# Altium PCB XH发衣柜从板.PcbDoc
Units mil, origin at the board's own origin, x right, y up, seen from the top; angles counter-clockwise.
Board outline 3160.03 x 1978.53 mil, 2 copper layers (Top Layer, Bottom Layer); 54 components, 33 nets, 159 pads, 238 vias.
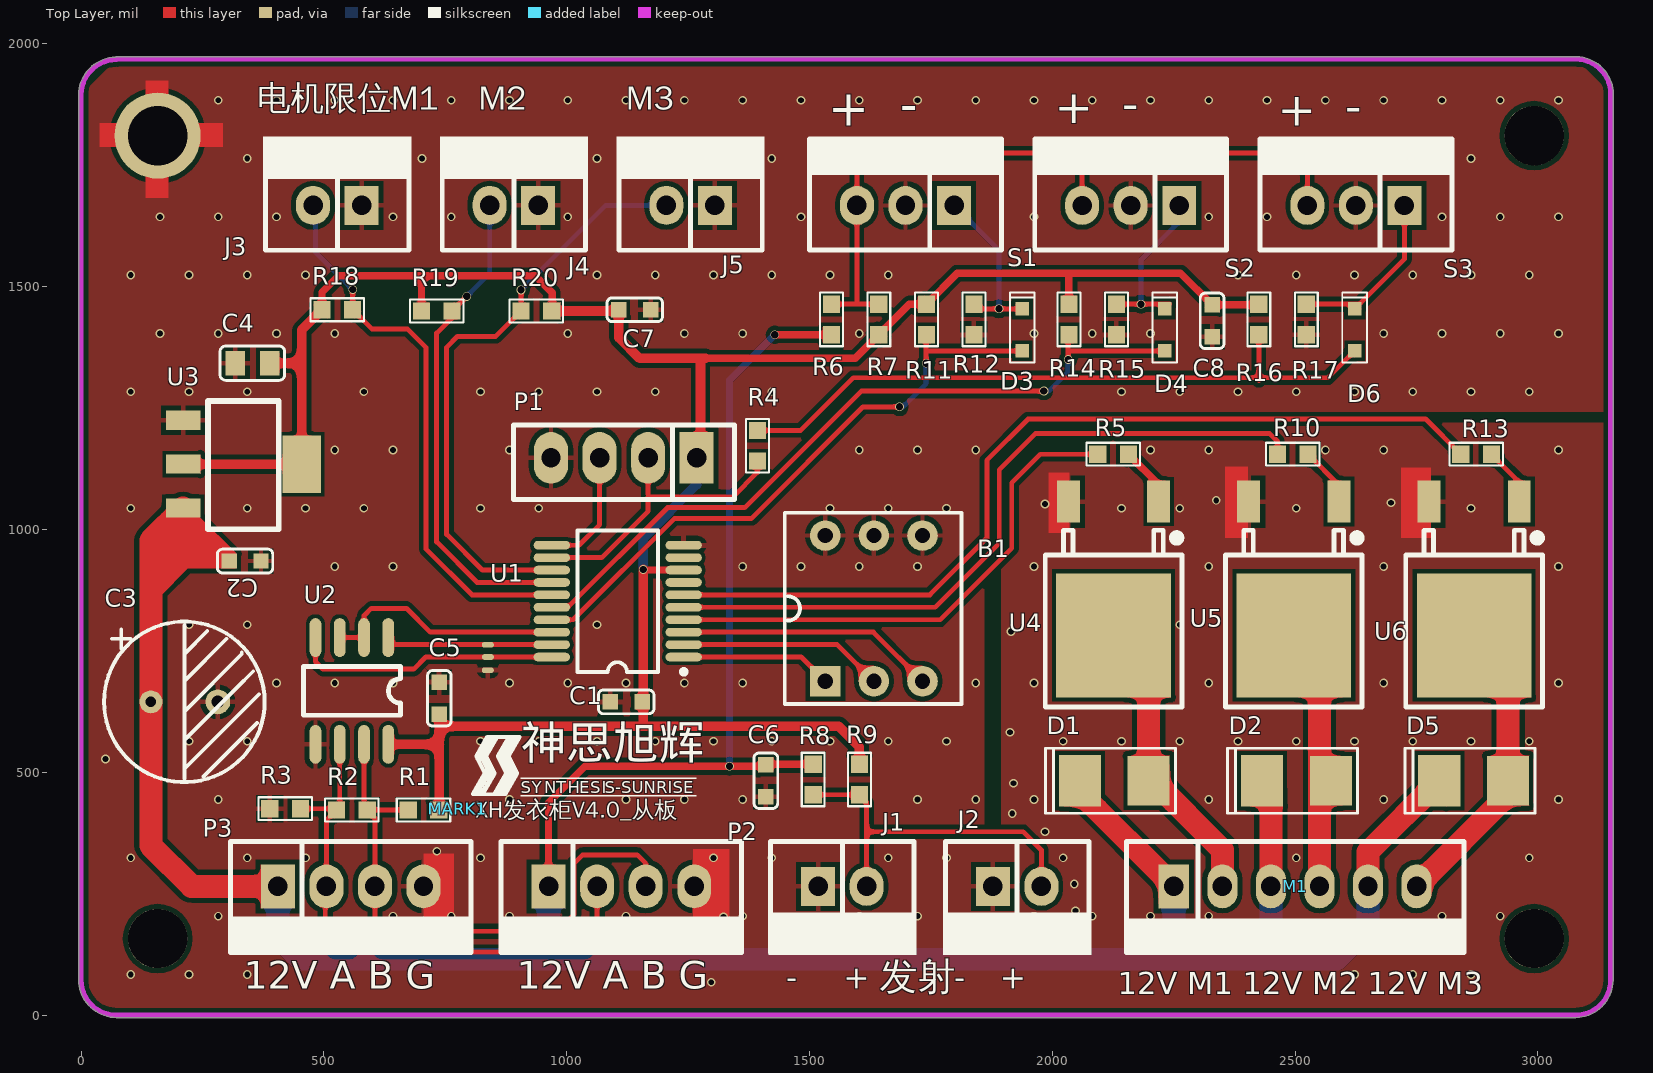
[diagram p0: Top Layer view]
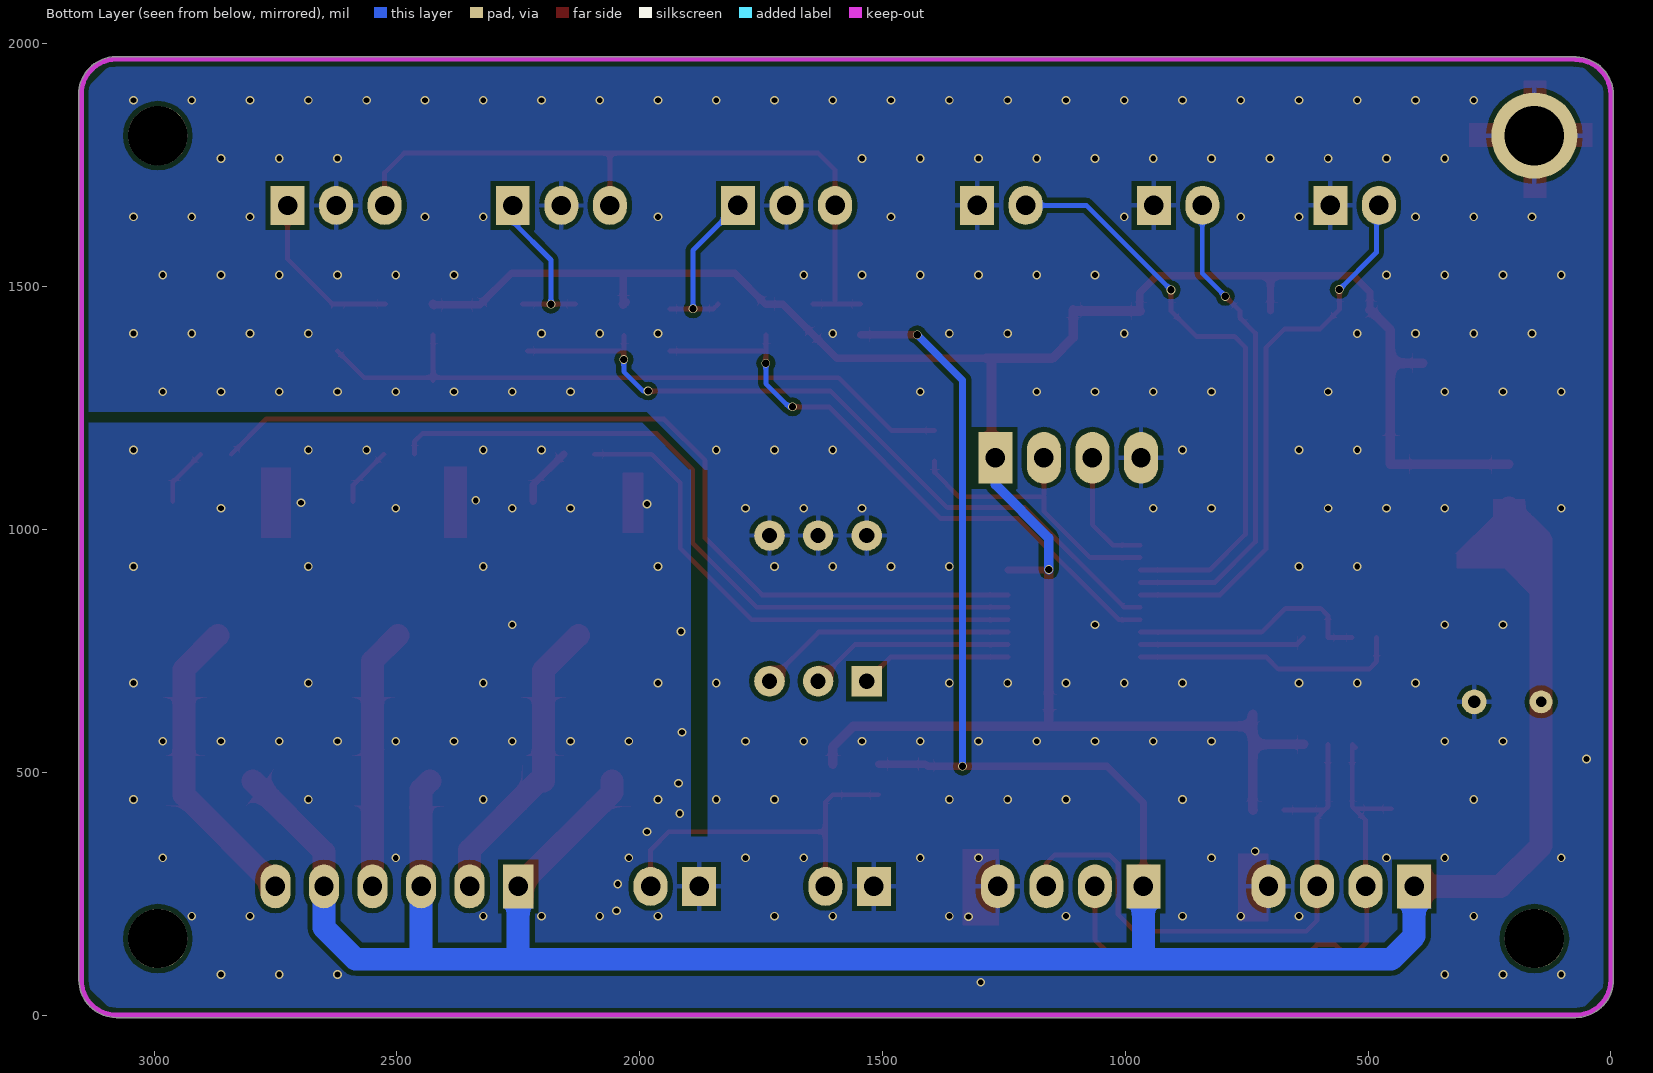
[diagram p1: Bottom Layer view, seen from below]
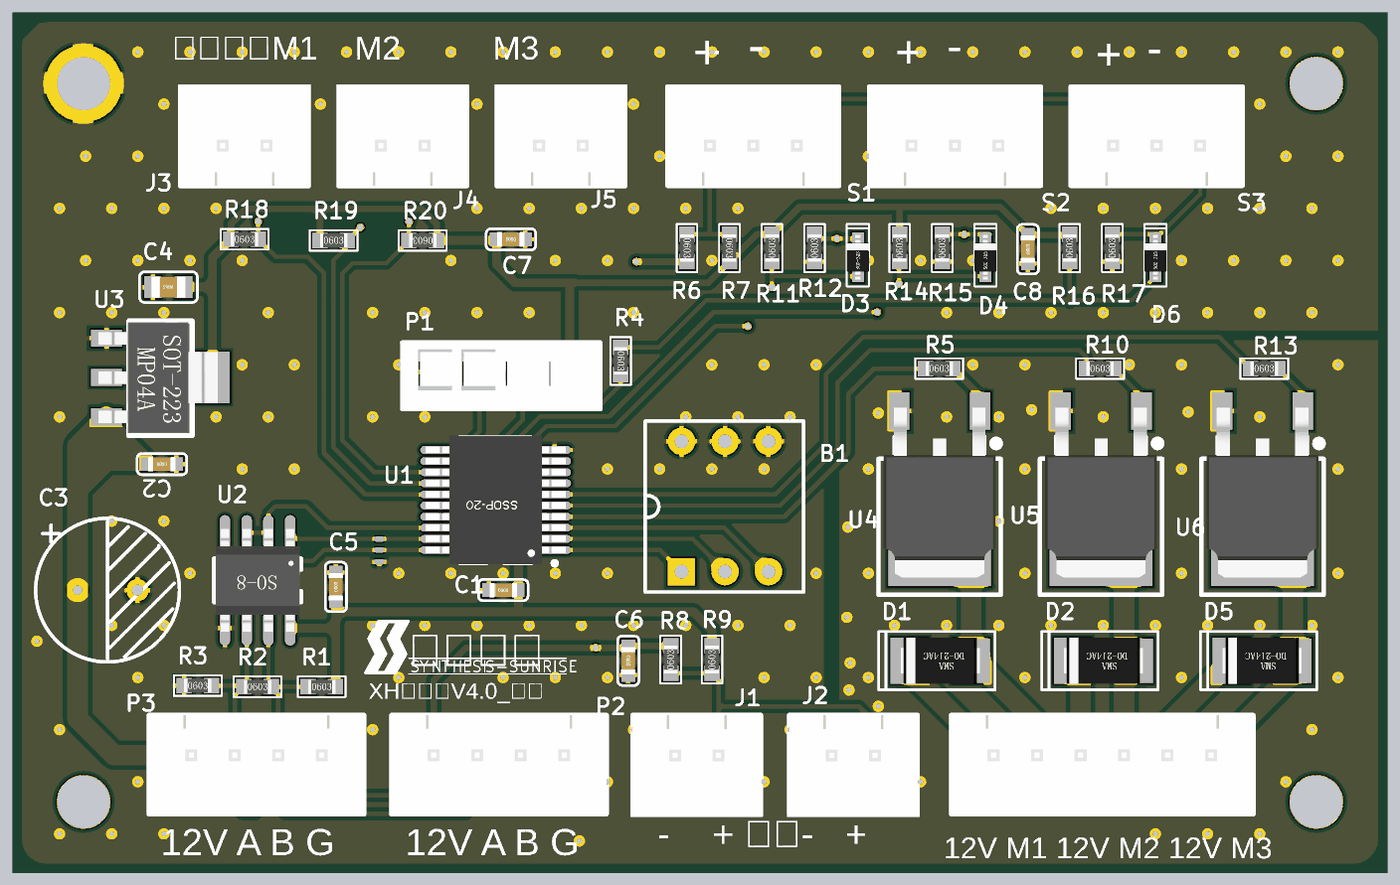
[diagram p2: 3D render of the assembled board from above, using the file's embedded part models]

## Layer stack, top to bottom
Top Solder: solder mask 0.4, Solder Resist, Dk 3.5
Top Layer: signal copper 1.4
Dielectric 1: dielectric 12.6, FR-4, Dk 4.8
Bottom Layer: signal copper 1.4
Bottom Solder: solder mask 0.4, Solder Resist, Dk 3.5

## Board outline
3077.07,-5.02 ccw(c3077.11,0) 3077.11,-5.02 ccw(c3077.11,72.5) 3077.23,-5.02 ccw(c3077.11,72.5) 3077.63,-5.01 ccw(c3077.11,72.5) 3154.62,71.98 ccw(c3077.11,72.5) 3154.62,72.5 3154.62,72.11 cw(c3149.61,72.11) 3154.62,71.98 3154.62,72.11 3154.62,1894.06 ccw(c3150,1896) 3155.02,1896 ccw(c3077.5,1896) 3079.51,1973.49 ccw(c3079,1968.5) 3079,1973.52 73.5,1973.52 ccw(c73.5,1968.5) 70.46,1972.49 ccw(c72.5,1895) -5.01,1895 -5.01,72.5 -5.02,72.5 cw(c0,72.5) -5.01,72.53 -5.02,72.5 ccw(c72.5,72.5) 72.5,-5.02 3077.5,-5.02 ccw(c3077.5,0)

## Design rules (kind name [scope] priority, off if disabled: settings)
Clearance [All] p1: gap=6 except(8: Track-Text SMDPad-THPad SMDPad-Poly SMDPad-Region SMDPad-Text THPad-THPad THPad-Region THPad-Text Via-Region Via-Text Fill-Text Poly-Text Region-Region Region-Text Text-Text; 10: Arc-SMDPad Arc-THPad Arc-Fill Arc-Poly Track-Fill Track-Poly THPad-Poly Via-Poly Fill-Poly Poly-Region; 30: Poly-Poly)
DiffPairsRouting DiffPair_DiffPairsRouting [InDifferentialPair ('CARD1')] p1: maxlimit=40 minlimit=10 mostfreqgap=10 toplayer_minwidth=10 toplayer_maxwidth=20 toplayer_prefwidth=10 bottomlayer_minwidth=10 bottomlayer_maxwidth=20 bottomlayer_prefwidth=10 maxuncoupledlength=500
DiffPairsRouting [All] p2: maxlimit=10 minlimit=10 mostfreqgap=10 toplayer_minwidth=10 toplayer_maxwidth=10 toplayer_prefwidth=10 bottomlayer_minwidth=10 bottomlayer_maxwidth=10 bottomlayer_prefwidth=10 maxuncoupledlength=500
HoleSize [All] p1: absolutevalues=TRUE maxlimit=1000 minlimit=8 maxpercent=80.000 minpercent=20.000
HoleToHoleClearance [All] p1: gap=6 allowstackedmicrovias=TRUE
Length "InNet('A') Or InNet('B')" [InNet('A') Or InNet('B')] p1: maxlimit=944.88 minlimit=866.14
Length "InNet('PUSBDM') Or InNet('PUSBDP')" [InNet('PUSBDM') Or InNet('PUSBDP')] p2: maxlimit=1931.8 minlimit=1923.8
Length "InNet('D+') Or InNet('D-')" [InNet('D+') Or InNet('D-')] p3: maxlimit=476 minlimit=470
Length "InNet('USB_P') Or InNet('USB_N')_1" [InNet('USB_P') Or InNet('USB_N')] p4: maxlimit=357 minlimit=355
Length "InNet('USB_P') Or InNet('USB_N')" [InNet('USB_P') Or InNet('USB_N')] p5: maxlimit=361 minlimit=351
Length "InNet('485B') Or InNet('485A')" [InNet('485B') Or InNet('485A')] p6: maxlimit=1137.07 minlimit=0
Length All [All] p7: maxlimit=20000 minlimit=0
Length "InNet('NetD4_2') Or InNet('NetD3_2')_1" [InNet('NetD4_2') Or InNet('NetD3_2')] p8: maxlimit=858.87 minlimit=820
Length "InNet('NetD4_2') Or InNet('NetD3_2')" [InNet('NetD4_2') Or InNet('NetD3_2')] p9: maxlimit=858.87 minlimit=0
MatchedLengths DiffPair_MatchedLengths [InDifferentialPair ('CARD1')] p1: tolerance=100 checknetsindiffpair=FALSE checkdiffpairvsdiffpair=TRUE checkxsignals=TRUE checkothers=TRUE
MinimumSolderMaskSliver [All] p1: minsoldermaskwidth=1
PolygonConnect [All] p1: connectstyle=Relief reliefconductorwidth=10 reliefentries=4 polygonreliefangle="90 Angle" airgapwidth=10
RoutingVias [All] p1: holewidth=11.81 width=22 viastyle="Through Hole" minholewidth=11.81 minwidth=18 maxholewidth=1000 maxwidth=1000
SilkToSilkClearance [All] p1: silktosilkclearance=0
SilkToSolderMaskClearance [IsPad] p1: minsilkscreentomaskgap=0 clearancetoexposedcopper=TRUE
SolderMaskExpansion [All] p1: expansion=4
Width [All] p1: maxlimit=1000 minlimit=5.98 preferedwidth=59.06
24 further rules are at their usual default settings.

## Classes and differential pairs
differential pair class "New Class": dif1 dif2 dif3 dif4 NewDifferentialPair1 NewDifferentialPair2 NewDifferentialPair3 NewDifferentialPair4

## Components (designator, comment, footprint, x,y, rotation, side; value= is the part's Value field where it differs from the comment)
B1 "拨码开关-3" DS-03-2.54 1632.5,837.5 r90 top
C1 "Cap_0603" 0603C 1122.5,645 r0 top
C2 "Cap_0603" 0603C 337.5,935 r180 top
C3 "Cap_直插470uf/16v" cap_470/16v 212.5,645 r0 top
C4 "Cap_钽电容B-3528" 0805C 352.5,1342.5 r180 top
C5 "Cap_0603" 0603C 737.5,652.5 r90 top
C6 "Cap_0603" 0603C 1410,482.5 r270 top
C7 "Cap_0603" 0603C 1140,1452.5 r180 top
C8 "Cap_0603" 0603C 2328.94,1429.83 r90 top
D1 "Diode_DO214AC" DO_214AC_SMA 2127.5,482.5 r180 top
D2 "Diode_DO214AC" DO_214AC_SMA 2502.5,482.5 r180 top
D3 "Diode_SOD323" SOD323_D 1937.97,1411.01 r90 top
D4 "Diode_SOD323" SOD323_D 2231.34,1411.01 r90 top
D5 "Diode_DO214AC" DO_214AC_SMA 2867.5,482.5 r180 top
D6 "Diode_SOD323" SOD323_D 2622.5,1411.01 r90 top
J1 "XHB2.54-2PIN-带锁扣" SIP2 1517.5,265 r0 top
J2 "XHB2.54-2PIN-带锁扣" SIP2 1877.5,265 r0 top
J3 "XHB2.54-2PIN-带锁扣" SIP2 577.5,1667.5 r180 top
J4 "XHB2.54-2PIN-带锁扣" SIP2 941.25,1667.5 r180 top
J5 "XHB2.54-2PIN-带锁扣" SIP2 1305,1667.5 r180 top
M1 "TJC6-2.54直座-k" SIP6 2250,265 r0 top
MARK1 "SDSES" SDSES 775,425 r0 top
P1 "4PIN直插2.54插针" SIP4_2D54F 1267.5,1147.5 r180 top
P2 "XHB2.54-4PIN直座" SIP4 962.5,265 r0 top
P3 "XHB2.54-4PIN直座" SIP4 405,265 r0 top
R1 "Res_0603" 0603R 705,422.5 r0 top
R2 "Res_0603" 0603R 557.5,422.5 r0 top
R3 "Res_0603" 0603R 420,425 r0 top
R4 "Res_0603" 0603R 1392.5,1172.5 r270 top
R5 "Res_0603" 0603R 2125,1155 r0 top
R6 "Res_0603" 0603R 1545,1432.5 r270 top
R7 "Res_0603" 0603R 1642.5,1432.5 r270 top
R8 "Res_0603" 0603R 1507.5,485.17 r90 top
R9 "Res_0603" 0603R 1602.5,485.17 r90 top
R10 "Res_0603" 0603R 2495,1155 r0 top
R11 "Res_0603" 0603R 1740.58,1432.5 r90 top
R12 "Res_0603" 0603R 1838.37,1432.5 r90 top
R13 "Res_0603" 0603R 2872.5,1155 r0 top
R14 "Res_0603" 0603R 2033.95,1432.5 r90 top
R15 "Res_0603" 0603R 2131.74,1432.5 r90 top
R16 "Res_0603" 0603R 2425.12,1432.5 r90 top
R17 "Res_0603" 0603R 2522.91,1432.5 r90 top
R18 "Res_0603" 0603R 527.5,1452.5 r0 top
R19 "Res_0603" 0603R 732.44,1450 r0 top
R20 "Res_0603" 0603R 937.39,1450 r180 top
S1 "TJC3-2.54直座" SIP3 1797.5,1667.24 r180 top
S2 "TJC3-2.54直座" SIP3 2261.25,1667.24 r180 top
S3 "TJC3-2.54直座" SIP3 2725,1667.24 r180 top
U1 "STC8FK264S2" SSOP20 1105,852.5 r180 top
U2 "SP3485E" SO_8 632.5,777.5 r270 top
U3 "LM1117" SOT223 210,1225 r270 top
U4 "NMOS" TO-252-2 2125,1057.5 r90 top
U5 "NMOS" TO-252-2 2496.25,1057.5 r90 top
U6 "NMOS" TO-252-2 2867.5,1057.5 r90 top

## Footprints (in the part's own frame and the unit in brackets; to place one, negate y for a bottom-side part, rotate by r counter-clockwise, add the part's x,y. Pads: shape width x height; smd on the part's side, far side on the other; paste and mask are expansions set on the pad)
0603C [mm]
  rect 0.8x0.8 smd: 1(-0.832,0) 2(0.832,0)
  silkscreen extent -1.45,-0.62 1.45,0.62, body extent -0.8,-0.42 0.8,0.43, height 0.82
0603R [mil]
  rect 35.43x35.43 smd: 1(-31.5,0) 2(31.5,0)
  silkscreen extent -55,-24 55,24, body extent -31,-16 32,16, height 18
0805C [mil]
  rect 40x50 smd: 1(-35.44,0) 2(35.43,0)
  silkscreen extent -67,-35 67,35, body extent -39,-25 39,25, height 49
cap_470/16v [mm]
  round 1.2 hole 0.55: 1(-1.75,0)
  round 1.3 hole 0.65: 2(1.75,0)
  silkscreen extent -4.2,-4.2 4.2,4.2, body extent -4.03,-4.03 4.03,4.03, height 12.03
DO_214AC_SMA [mm]
  rect 2.2x2.6 smd: 1(-1.8,0)
  rect 2.2x2.68 smd: 2(1.8,0)
  silkscreen extent -3.2,-1.7 3.6,1.7, body extent -2.3,-1.35 2.3,1.35, height 2.4
DS-03-2.54 [mm]
  rect 1.6x1.6 hole 0.8: 1(-3.81,2.54)
  round 1.6 hole 0.8: 2(-3.81,0) 3(-3.81,-2.54) 4(3.81,-2.54) 5(3.81,0) 6(3.81,2.54)
  silkscreen extent -5,-4.58 5,4.66, body extent -4.95,-4 4.95,4.13, height 7
SDSES [mil]
  silkscreen extent 31,27 492,148
SIP2 [mil]
  rect 70x80 hole 40: 1(0,0)
  oval 70x80 hole 40: 2(100,0)
  silkscreen extent -103,-142 203,93, body extent -98,-136 198,92, height 394
SIP3 [mil]
  rect 70x80 hole 40: 1(0,0)
  oval 70x80 hole 40: 2(100,0) 3(200,0)
  silkscreen extent -98,-142 298,92, body extent -98,-137 298,92, height 394
SIP4 [mil]
  rect 70x90 hole 40: 1(0,0)
  oval 70x90 hole 40: 2(100,0) 3(200,0) 4(300,0)
  silkscreen extent -98,-141 399,93, body extent -98,-136 398,93, height 394
SIP4_2D54F [mil]
  rect 70x106.3 hole 40: 1(0,0)
  oval 70x106.3 hole 40: 2(100,0) 3(200,0) 4(300,0)
  silkscreen extent -78,-68 377,86, body extent -78,-68 382,86, height 260
SIP6 [mil]
  rect 62x90 hole 40: 1(0,0)
  oval 62x90 hole 40: 2(100,0) 3(200,0) 4(300,0) 5(400,0) 6(500,0)
  silkscreen extent -98,-141 598,93, body extent -98,-136 598,93, height 394
SO_8 [mil]
  oval 80x24 smd: 1(0,0) 2(0,-50) 3(0,-100) 4(0,-150) 5(220,-150) 6(220,-100) 7(220,-50) 8(220,0)
  silkscreen extent 60,-175 160,25, body extent -8,-171 228,22, height 67
SOD323_D [mm]
  rect 0.7x0.7 smd: 1(-1.1,0) 2(1.1,0)
  silkscreen extent -1.7,-0.65 1.95,0.65, body extent -1.3,-0.65 1.3,0.65, height 1
SOT223 [mm]
  rect 1x1.8 smd: 1(0,0) 2(2.3,0) 3(4.6,0)
  rect 3x2 smd: 4(2.3,6.2)
  silkscreen extent -1,1.3 5.7,5, body extent -0.94,-0.46 5.56,6.5, height 1.7
SSOP20 [mm]
  oval 1.9x0.45 smd: 1(-3.45,2.925) 2(-3.45,2.275) 3(-3.45,1.625) 4(-3.45,0.975) 5(-3.45,0.325) 6(-3.45,-0.325) 7(-3.45,-0.975) 8(-3.45,-1.625) 9(-3.45,-2.275) 10(-3.45,-2.925) 11(3.45,-2.925) 12(3.45,-2.275) 13(3.45,-1.625) 14(3.45,-0.975) 15(3.45,-0.325) 16(3.45,0.325) 17(3.45,0.975) 18(3.45,1.625) 19(3.45,2.275) 20(3.45,2.925)
  silkscreen extent -3.58,-3.7 2.1,3.82, body extent -4.1,-3.76 4.1,3.74, height 1.75
TO-252-2 [mm]
  rect 2.2x1.2 smd: 1(0,-2.386) 3(-0.004,2.336)
  rect 6.5x6 smd: 2(-7,-0.025)
  silkscreen extent -10.75,-3.6 -1.5,3.55, body extent -9.74,-3.29 0.2,3.24, height 2.44

## Part data
C3 C4: "Polarized Capacitor (Radial)"
D1 D2 D3 D4 D5 D6: "Default Diode"
J1 J2 J3 J4 J5: library part XHB2.54-2P直座, "Header, 4-Pin"
M1: "Header, 6-Pin"
P1 P2 P3: "Header, 4-Pin"
R1 R2 R3 R4 R5 R6 R7 R8 R9 R10 R11 R12 R13 R14 R15 R16 R17 R18 R19 R20: "Resistor"
S1 S2 S3: "Header, 3-Pin"
U2: library part SP485E

## Free pads (board coordinates)
  round 122.05 hole 122.05: 0(157.48,157.48) 0(2992.13,157.48) 0(2992.13,1811.02)
  round 177.17 hole 122.05: 0(157.48,1811.02)
  oval 25x12 smd: 2(837.5,762.5) 3(837.5,737.34) 4(837.5,710)

## Via types
v1: diameter 18, hole 12, Top Layer to Bottom Layer, 226 vias
v2: diameter 18, hole 15, Top Layer to Bottom Layer, 12 vias

## Nets (pads, with @x,y where several pads share a name; then routed paths per layer and width w, separated by ;. In a path a pad name is that pad's centre, name@x,y a point inside that pad or via, vN(x,y) a via of type N, cw(c..) or ccw(c..) an arc to the next point about the centre after c; other vN are vias at no path point)
485EN: U1.18 U2.2 U2.3 | length 508.2
  Top Layer w10: U2.3 U2.2 582.5,822.5 597.5,837.5 670,837.5 718.98,788.52 U1.18
A: P2.2 P3.2 R2.1 R3.2 U2.6 | length 1202.2
  Top Layer w10: R3.2 523.5,425 R2.1 ; P3.2@502.5,262.5 502.5,150 522.5,130 552.5,130 567.5,145 605,145 620,130 1037.5,130 1062.5,155 P2.2 ; P3.2 505,401.5 R2.1 ; U2.6@526,551 U2.6 532.5,429 R2.1
B: P2.3 P3.3 R1.1 R2.2 U2.7 | length 1204.6
  Top Layer w10: U2.7 582.5,429 R2.2 ; R1.1 R2.2 ; P2.3 1162.5,312.5 1145,330 1032.5,330 1015,312.5 1015,207.5 980,172.5 627.5,172.5 605,195 P3.3 605,406.5 R2.2
GND: B1.4 B1.5 B1.6 C1.1 C2.1 C3.2 C4.2 C5.2 C6.2 C7.1 C8.1 J1.1 J2.1 J3.1 J4.1 J5.1 P1.4 P2.4 P3.4 pad.0@157.48,1811.02 pad.4 R3.1 R12.1 R15.1 R17.1 S1.2 S2.2 S3.2 U1.10 U2.5 U3.1 U4.3 U5.3 U6.3
  other v1: 1297.5,67.5 102.12,83.8 222.12,83.8 342.12,83.8 2622.12,83.8 2742.12,83.8 2862.12,83.8 1322.5,202.5 282.12,203.8 642.12,203.8 762.12,203.8 882.12,203.8 1122.12,203.8 1362.12,203.8 1602.12,203.8 1722.12,203.8 1962.12,203.8 2082.12,203.8 2202.12,203.8 2322.12,203.8 2802.12,203.8 2922.12,203.8 2047.5,215 2045,270 102.12,323.8 342.12,323.8 462.12,323.8 822.12,323.8 1302.12,323.8 1422.12,323.8 1662.12,323.8 1782.12,323.8 2022.12,323.8 2502.12,323.8 2982.12,323.8 732.5,337.5 1985,377.5 1917.5,415 282.12,443.8 882.12,443.8 1122.12,443.8 1242.12,443.8 1362.12,443.8 1722.12,443.8 1842.12,443.8 1962.12,443.8 2322.12,443.8 2682.12,443.8 3042.12,443.8 1920,477.5 50,527.5 222.12,563.8 342.12,563.8 822.12,563.8 942.12,563.8 1062.12,563.8 1182.12,563.8 1302.12,563.8 1422.12,563.8 1542.12,563.8 1662.12,563.8 1782.12,563.8 2022.12,563.8 2142.12,563.8 2262.12,563.8 2382.12,563.8 2502.12,563.8 2622.12,563.8 2742.12,563.8 2862.12,563.8 2982.12,563.8 1912.5,582.5 402.12,683.8 522.12,683.8 642.12,683.8 882.12,683.8 1002.12,683.8 1122.12,683.8 1242.12,683.8 1362.12,683.8 1842.12,683.8 1962.12,683.8 2322.12,683.8 2682.12,683.8 3042.12,683.8 1915,790 222.12,803.8 342.12,803.8 1062.12,803.8 2262.12,803.8 522.12,923.8 642.12,923.8 1362.12,923.8 1482.12,923.8 1602.12,923.8 1722.12,923.8 1962.12,923.8 2322.12,923.8 2682.12,923.8 3042.12,923.8 102.12,1043.8 342.12,1043.8 462.12,1043.8 582.12,1043.8 822.12,1043.8 942.12,1043.8 1542.12,1043.8 1662.12,1043.8 1782.12,1043.8 2142.12,1043.8 2262.12,1043.8 2502.12,1043.8 2862.12,1043.8 1985,1052.5 2697.5,1055 2337.5,1060 522.12,1163.8 642.12,1163.8 882.12,1163.8 1602.12,1163.8 1722.12,1163.8 1842.12,1163.8 2202.12,1163.8 2322.12,1163.8 2562.12,1163.8 2682.12,1163.8 3042.12,1163.8 102.12,1283.8 222.12,1283.8 342.12,1283.8 582.12,1283.8 822.12,1283.8 942.12,1283.8 1062.12,1283.8 1182.12,1283.8 1422.12,1283.8 2142.12,1283.8 2262.12,1283.8 2382.12,1283.8 2502.12,1283.8 2622.12,1283.8 2742.12,1283.8 2862.12,1283.8 2982.12,1283.8 162.12,1403.8 282.12,1403.8 402.12,1403.8 522.12,1403.8 1002.12,1403.8 1242.12,1403.8 1362.12,1403.8 1602.12,1403.8 1962.12,1403.8 2082.12,1403.8 2202.12,1403.8 2682.12,1403.8 2802.12,1403.8 2922.12,1403.8 3042.12,1403.8 102.12,1523.8 222.12,1523.8 342.12,1523.8 462.12,1523.8 1062.12,1523.8 1182.12,1523.8 1302.12,1523.8 1422.12,1523.8 1542.12,1523.8 1662.12,1523.8 2382.12,1523.8 2502.12,1523.8 2622.12,1523.8 2742.12,1523.8 2862.12,1523.8 2982.12,1523.8 162.12,1643.8 282.12,1643.8 402.12,1643.8 642.12,1643.8 762.12,1643.8 1002.12,1643.8 1482.12,1643.8 1962.12,1643.8 2322.12,1643.8 2442.12,1643.8 2802.12,1643.8 2922.12,1643.8 3042.12,1643.8 342.12,1763.8 462.12,1763.8 582.12,1763.8 702.12,1763.8 822.12,1763.8 942.12,1763.8 1062.12,1763.8 1182.12,1763.8 1302.12,1763.8 1422.12,1763.8 1542.12,1763.8 2622.12,1763.8 2742.12,1763.8 2862.12,1763.8 282.12,1883.8 402.12,1883.8 522.12,1883.8 642.12,1883.8 762.12,1883.8 882.12,1883.8 1002.12,1883.8 1122.12,1883.8 1242.12,1883.8 1362.12,1883.8 1482.12,1883.8 1602.12,1883.8 1722.12,1883.8 1842.12,1883.8 1962.12,1883.8 2082.12,1883.8 2202.12,1883.8 2322.12,1883.8 2442.12,1883.8 2562.12,1883.8 2682.12,1883.8 2802.12,1883.8 2922.12,1883.8 3042.12,1883.8
INFRARE1: D3.1 R11.1 U1.17 | length 1270.3
  Top Layer w10: U1.17 1012.8,814.11 1221.19,1022.5 1380,1022.5 1610,1252.5 v2(1685,1252.5) ; v2(1740,1342.5) R11.1@1740,1400.42 ; 1740.2,1367.7 D3.1
  Bottom Layer w10: v2(1685,1252.5) 1692.5,1252.5 1740,1300 v2(1740,1342.5)
INFRARE2: D4.1 R14.1 U1.16 | length 1537.5
  Top Layer w10: U1.16 1002.2,839.7 1207.5,1045 1366.31,1045 1606.31,1285 v2(1982.5,1285) ; v2(2032.5,1350) R14.1@2032.5,1399.55 ; 2032.7,1367.7 D4.1
  Bottom Layer w10: v2(1982.5,1285) 1992.5,1285 2032.5,1325 v2(2032.5,1350)
INFRARE3: D6.1 R4.1 R16.1 | length 1392.1
  Top Layer w10: R4.1 1481.5,1204 1590,1312.5 2425.12,1312.5 ; 2425.12,1306.73 2425.12,1312.5 ; R16.1 2425.12,1312.5 ; D6.1 2567.3,1312.5 2425.12,1312.5
M1: D1.1 M1.2 U4.2 | length 615.1
  Top Layer w47.24: U4.2 2198.37,709.53 D1.1 2207.5,482.5 2350,340 M1.2
M2: D2.1 M1.4 U5.2 | length 538.8
  Top Layer w47.24: U5.2 2550,729.14 2550,482.5 M1.4
M3: D5.1 M1.6 U6.2 | length 623.9
  Top Layer w47.24: M1.6 2938.37,453.37 D5.1 2938.37,712.03 U6.2
MOTOR1: R5.1 U1.4 | length 1072.9
  Top Layer w10: U1.4 1769,814.11 1916.18,961.3 1916.18,1096.18 1975,1155 R5.1
MOTOR2: R10.1 U1.5 | length 1492.6
  Top Layer w10: U1.5 1758.4,839.7 1890.59,971.9 1890.59,1123.09 1965,1197.5 2447.5,1197.5 2463.5,1181.5 R10.1
MOTOR3: R13.1 U1.6 | length 1874
  Top Layer w10: U1.6 1747.8,865.3 1865,982.5 1865,1142.5 1950,1227.5 2768.5,1227.5 R13.1
NetD3_2: D3.2 R12.2 S1.1 | length 354.8
  Top Layer w10: R12.2 1848.05,1454.32 v2(1890,1454.32) D3.2
  Bottom Layer w10: S1.1 1890,1574.74 v2(1890,1454.32)
NetD4_2: D4.2 R15.2 S2.1 | length 345.1
  Top Layer w10: R15.2 v2(2182.5,1464) 2231.34,1464 D4.2@2241.02,1464
  Bottom Layer w10: v2(2182.5,1464) 2182.5,1555 2261.25,1633.75 S2.1
NetD6_2: D6.2 R17.2 S3.1 | length 351
  Top Layer w10: R17.2 2622.5,1464 2632.18,1464 2725,1556.82 S3.1
NetR5_2: R5.2 U4.1 | length 123.4
  Top Layer w15: R5.2 2218.95,1092.55 U4.1
NetR10_2: R10.2 U5.1 | length 123.9
  Top Layer w10: R10.2 2590.2,1091.3 U5.1
NetR13_2: R13.2 U6.1 | length 121.3
  Top Layer w10: R13.2 2961.45,1097.55 U6.1
RXD: P1.3 U1.11 | length 253.4
  Top Layer w10: U1.11 1025.16,967.66 1067.5,1010 P1.3
SENSOR1: J3.2 R18.2 U1.15 | length 1145.2
  Top Layer w10: v2(559,1494) R18.2 599,1412.5 672.5,1412.5 710,1375 710,960.12 804.82,865.3 U1.15
  Bottom Layer w10: J3.2 482.5,1662.5 482.5,1570.5 v2(559,1494)
SENSOR2: J4.2 R19.2 U1.14 | length 1010.3
  Top Layer w10: v2(793.94,1480) R19.2 763.94,1436.44 731.9,1404.4 731.9,974.4 815.42,890.89 U1.14
  Bottom Layer w10: v2(793.94,1480) 841.25,1527.31 J4.2
SENSOR3: J5.2 R20.2 U1.13 | length 1231.2
  Top Layer w10: v2(905.89,1493.39) R20.2 853.39,1397.5 775,1397.5 752.5,1375 752.5,990 826.02,916.48 U1.13
  Bottom Layer w10: v2(905.89,1493.39) 1080,1667.5 J5.2
SW1: B1.1 U1.1 | length 312.3
  Top Layer w10: U1.1 1482.66,737.34 B1.1
SW2: B1.2 U1.2 | length 422.9
  Top Layer w10: U1.2 1557.07,762.93 B1.2
SW3: B1.3 U1.3 | length 533.5
  Top Layer w10: U1.3 1631.48,788.52 B1.3
TXD: P1.2 R4.2 U1.12 | length 612.1
  Top Layer w10: U1.12 1072.07,942.07 1167.5,1037.5 1167.5,1067.5 1342.5,1067.5 1392.5,1117.5 R4.2 ; 1167.5,1072.5 P1.2
USART2-RX: pad.2 U1.19 U2.1 | length 342.7
  Top Layer w10: U2.1 647.07,762.93 837.5,762.93 U1.19
USART2-TX: pad.3 U1.20 U2.4 | length 553.2
  Top Layer w10: U2.4 482.5,727.5 497.5,712.5 685,712.5 709.84,737.34 pad.3 U1.20
VCC5V: C1.2 C4.1 C5.1 C7.2 C8.2 P1.1 R1.2 R7.2 R9.2 R11.2 R14.2 R16.2 R18.1 R19.1 R20.1 U1.8 U2.8 U3.2 U3.4 | length 5091.6
  Top Layer w15: R18.1 496,1488.5 530,1522.5 700.94,1522.5 ; R19.1 700.94,1522.5 ; R20.1@970,1452.5 970,1487.5 935,1522.5 700.94,1522.5 ; v2@1158.52,916.48 U1.8 ; 1285.5,1352.5 1594,1352.5 R7.2 1705.5,1464 R11.2 1804.08,1527.5 2264.02,1527.5 C8.2 R16.2@2423.7,1462.58 ; R14.2 2033.95,1527.4
  Top Layer w20: U3.2 U3.4 454.09,1410.59 R18.1 ; C4.1 454.09,1342.5 ; U2.8 737.5,557.5 ; R1.2 737.5,423.5 737.5,557.5 ; C5.1 737.5,595 ; R20.1 1104.75,1450 C7.2 1107.25,1395.25 1150,1352.5 1285.5,1352.5 ; 1157.75,597.25 1157.75,635 1157.5,635.25 1157.5,645 v2(1157.5,917.5) v2@1158.52,916.48 ; P1.1 1275.25,1155.25 1275.25,1342.25 ; R9.2 1602.5,552.5 1560,595 737.5,595 ; R14.2@2030,1467.95 R14.2 ; R16.2@2423.7,1462.58 R16.2 ; 737.5,557.5 737.5,595
  Bottom Layer w20: v2(1157.5,917.5) 1157.5,982.5 1267.5,1092.5 P1.1
VCC12V: C2.2 C3.1 C6.1 D1.2 D2.2 D5.2 M1.1 M1.3 M1.5 P2.1 P3.1 R6.2 R8.2 U3.3 | length 6522.7
  Top Layer w15: P2.1 962.5,437.5 1037.5,512.5 v2(1335,512.5) 1407.25,512.5 C6.1 1411.42,516.67 R8.2 ; v2(1428.5,1401) R6.2
  Top Layer w47.24: U3.3 143.6,977.5 C3.1 143.6,348.9 227.5,265 P3.1 ; D1.2 2056.63,458.37 M1.1 ; D2.2 2450,464.13 M1.3 ; M1.5 2650,335.87 D5.2
  Bottom Layer w15: v2(1335,512.5) 1335,1307.5 v2(1428.5,1401)
  Bottom Layer w47.24: P3.1 405,162.5 452.5,115 2585,115 2650,180 M1.5 ; 962.5,127.5 P2.1 ; 2250,117.5 M1.1 ; 2450,120 M1.3
VCC_SENSOR: J1.2 J2.2 R8.1 R9.1 | length 740.4
  Top Layer w10: R8.1 R9.1 1617.5,438.67 1617.5,377.5 ; J1.2 1617.5,377.5 ; J2.2 1977.5,340 1940,377.5 1617.5,377.5
VCC_SS: R6.1 R7.1 S1.3 S2.3 S3.3 | length 1505.4
  Top Layer w10: R6.1 R7.1 R7.1@1642.79,1464 ; 1597.5,1466.5 S1.3 1597.5,1740 1632.5,1775 2061.25,1775 ; S2.3 2061.25,1775 ; S3.3 2525,1735 2485,1775 2061.25,1775
pads on no net: U1.7 U1.9

## Polygon pours and split planes (outlines as drawn)
GND on Bottom Layer "Top Layer-No Net" (solid, remove dead copper, pour order 22): 72.5,1967.5 0,1895 0,72.5 72.5,0 3077.5,0 3149.61,72.11 3149.61,1897.89 3079,1968.5
GND on Top Layer "Top Layer-No Net" (solid, remove dead copper, pour order 24): 0,1895 73.5,1968.5 3079,1968.5 3149.61,1897.89 3147.5,1895.79 3147.5,62.5 3147.5,55 3092.5,0 65,0 62.5,0 0,62.5

## Keep-outs
Keep-Out Layer:
  lines w10: 72.5,1967.5 ccw(c72.5,1895) 0,1895 0,72.5 ccw(c72.5,72.5) 72.5,0 3077.5,0 ; 73.5,1968.5 3079,1968.5 ; 3077.11,0 ccw(c3077.11,72.5) 3149.61,72.5 ; 3077.5,1968.5 cw(c3077.5,1896) 3150,1896 ; 3149.61,72.11 3149.61,1897.89

## Other copper
Top Layer:
  rectangle net GND: 1260,185 1335,342.5
  rectangle net GND: 705,192.5 767.5,332.5
  rectangle net GND: 37.5,1787.5 292.5,1837.5
  rectangle net GND: 132.5,1682.5 180,1925
  rectangle net GND: 2717.5,982.5 2780,1127.5
  rectangle net GND: 2355,982.5 2402.5,1130
  rectangle net GND: 1992.5,992.5 2035,1117.5
  region net VCC12V: 177.5,1062.5 242.5,1062.5 242.5,1027.5 320,950 317.5,947.5 317.5,920 220,920 162.5,862.5 162.5,857.5 162.5,950
Multi-Layer:
  pour cut-out: 1865.59,1123.09 1985,1242.5 2017.5,1242.5 1898.09,1123.09
  pour cut-out: 1992.5,1242.5 1992.5,1220 3170,1220 3192.5,1242.5
  pour cut-out: 1860,1123.09 1895,1123.09 1895,920 1895,367.5 1860,367.5

## Silkscreen, mask and mechanical layers (free items; w line width, h text height)
Top Overlay:
  text "-  +" at 1722.5,1920 h125.98 r180
  text "-  +" at 2177.5,1917.5 h118.11 r180
  text "-  +" at 2637.5,1912.5 h118.11 r180
  text "电机限位M1    M2          M3" at 362.5,1847.5 h86.61
  text "XH发衣柜V4.0_从板" at 812.5,395 h59.06
  text "12V A B G" at 335,35 h98.43
  text "12V A B G" at 897.5,35 h98.43
  text "-    + 发射-   +" at 1455,32.5 h98.43
  text "12V M1 12V M2 12V M3" at 2135,27.5 h78.74

## Dimensions
72.5,0 to 0,1968.5 on Keep-Out Layer
3149.61,0 to 0,72.5 on Keep-Out Layer

## Text inside footprints (layer, text, board x,y; h text height)
MARK1: Top Overlay "神思旭辉" at 905.65,504.91 h118.11; Top Overlay "S" at 905.65,457.21 h25; Top Overlay "Y" at 928.1,457.23 h25; Top Overlay "N" at 954.1,457.23 h25; Top Overlay "T" at 978.1,457.23 h25; Top Overlay "E" at 1026.1,457.23 h25; Top Overlay "S" at 1048.1,457.23 h25; Top Overlay "I" at 1071.8,457.21 h25; Top Overlay "S-SUNRISE" at 1078.07,457.21 h25; Top Overlay "H" at 1002.1,457.23 h25